# Altium PCB TTFT3.PcbDoc
Units mm, origin at the board's own origin, x right, y up, seen from the top; angles counter-clockwise.
Board outline 37.62 x 17.09 mm, 4 copper layers (Top Layer, Internal Plane 1, Internal Plane 2, Bottom Layer), stack 0.778 mm thick; 58 components, 51 nets, 261 pads, 50 vias.
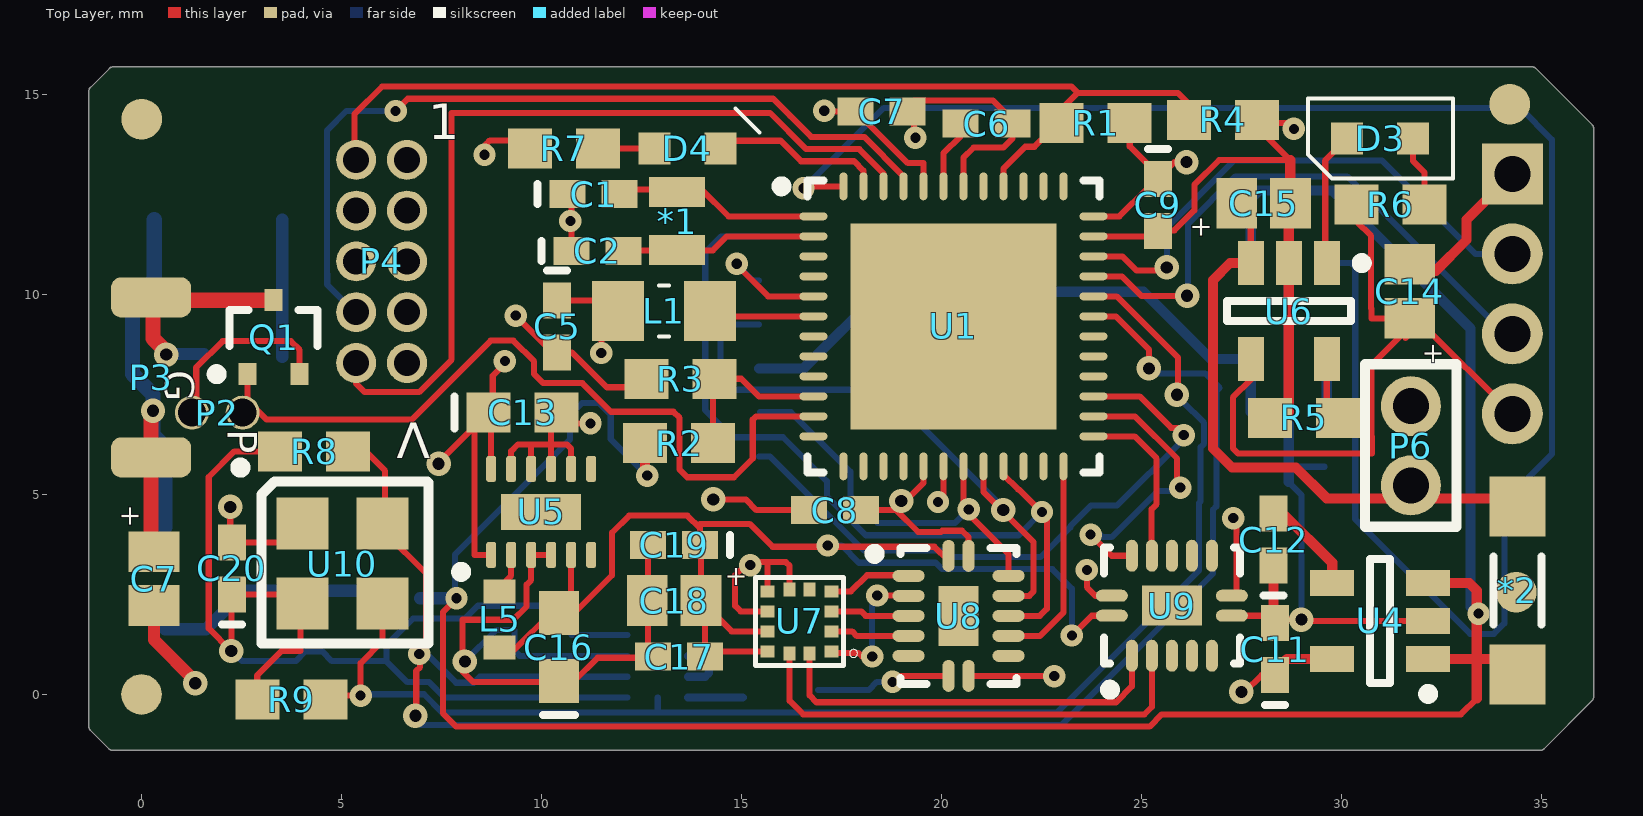
[diagram p0: Top Layer view]
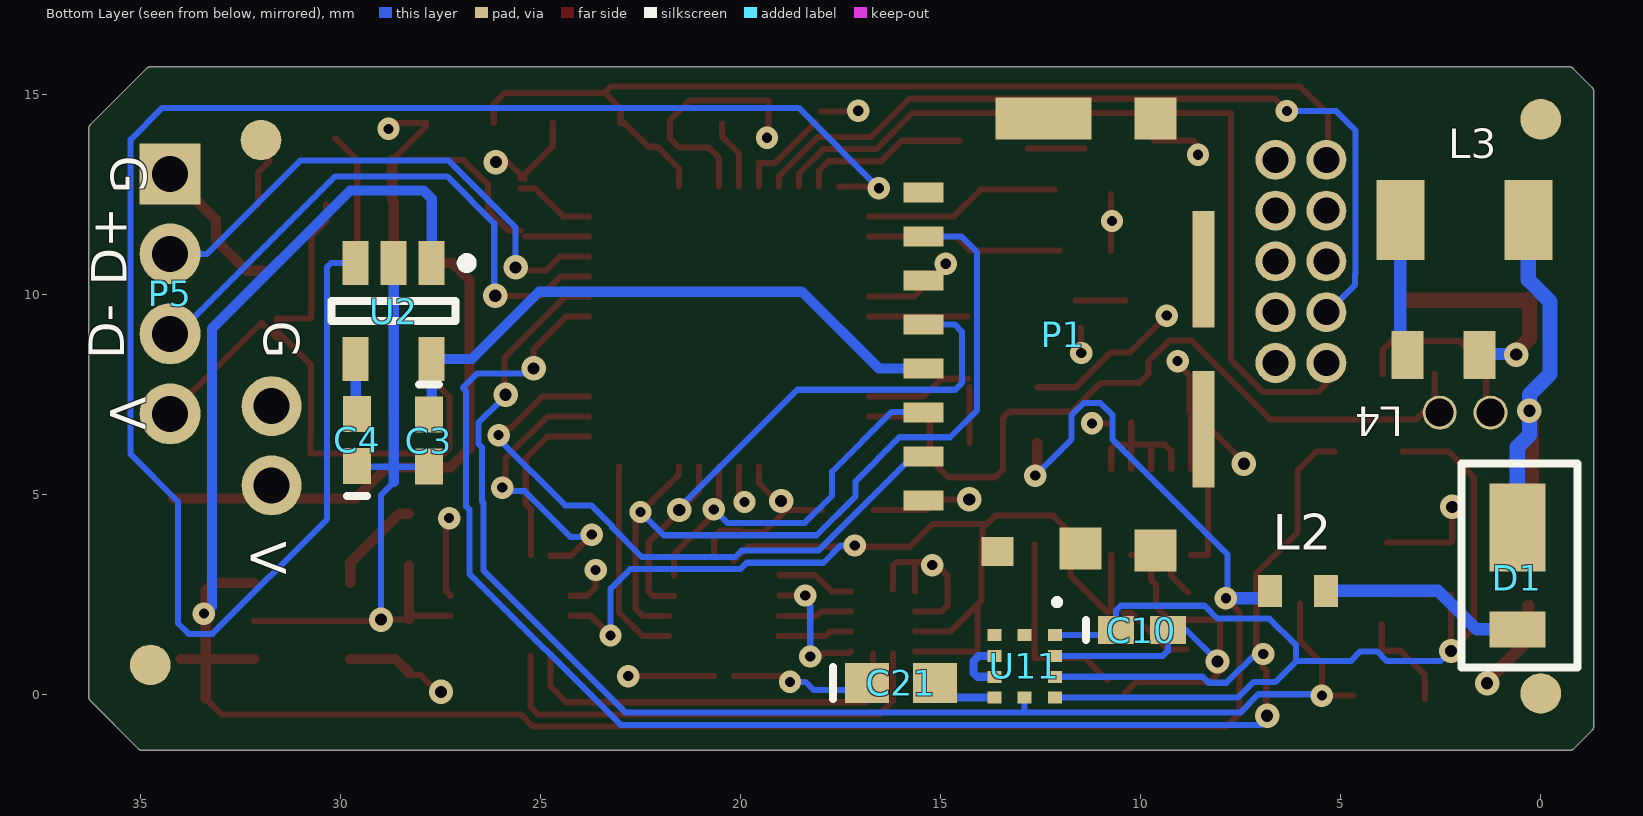
[diagram p1: Bottom Layer view, seen from below]
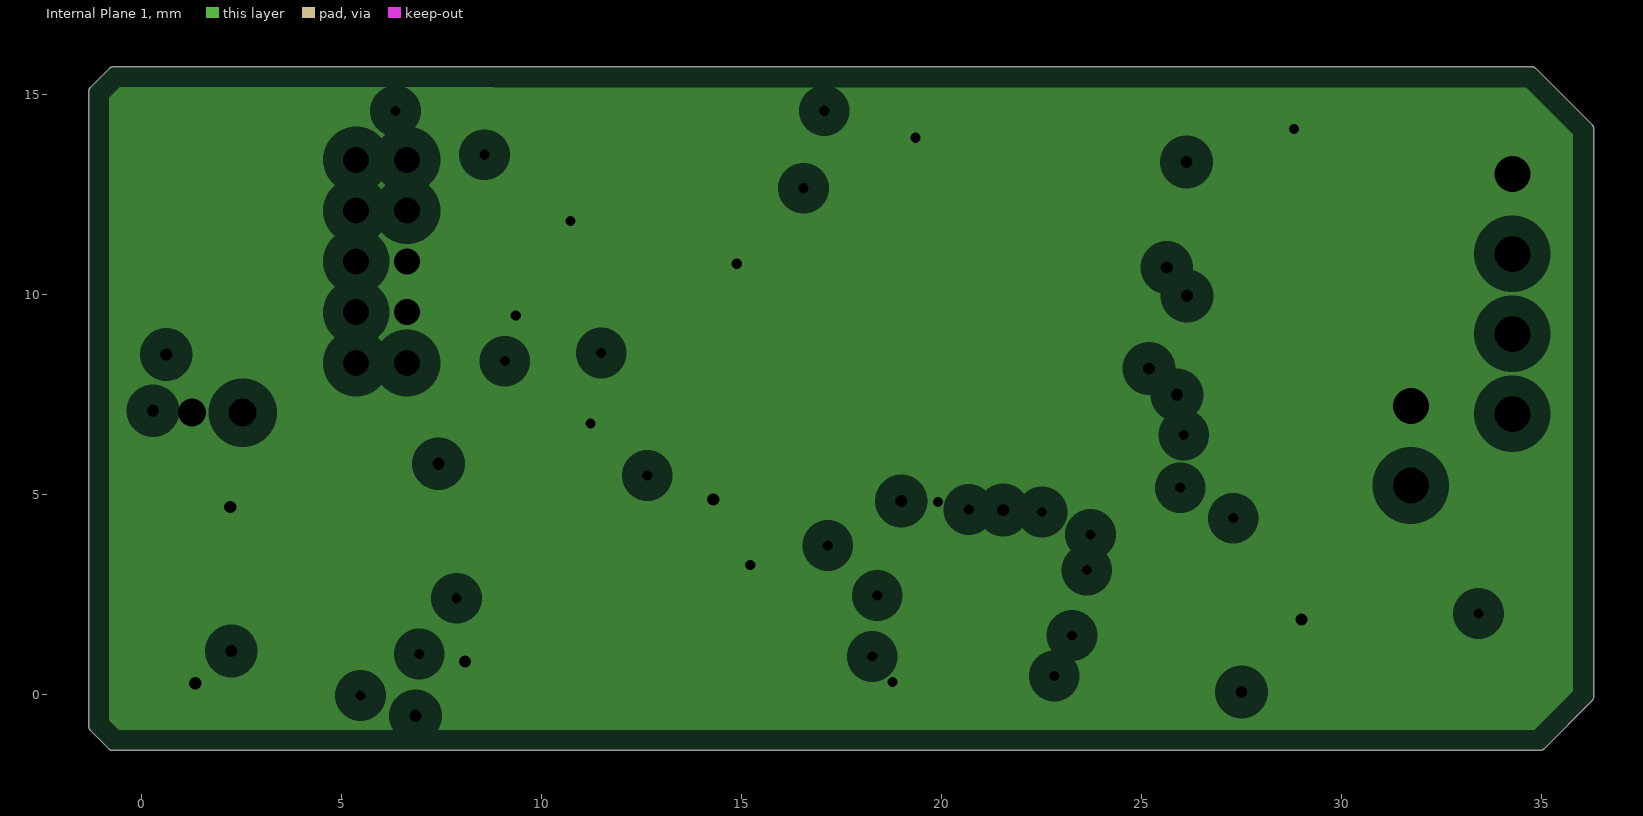
[diagram p2: Internal Plane 1, clearances drawn from the general rule]
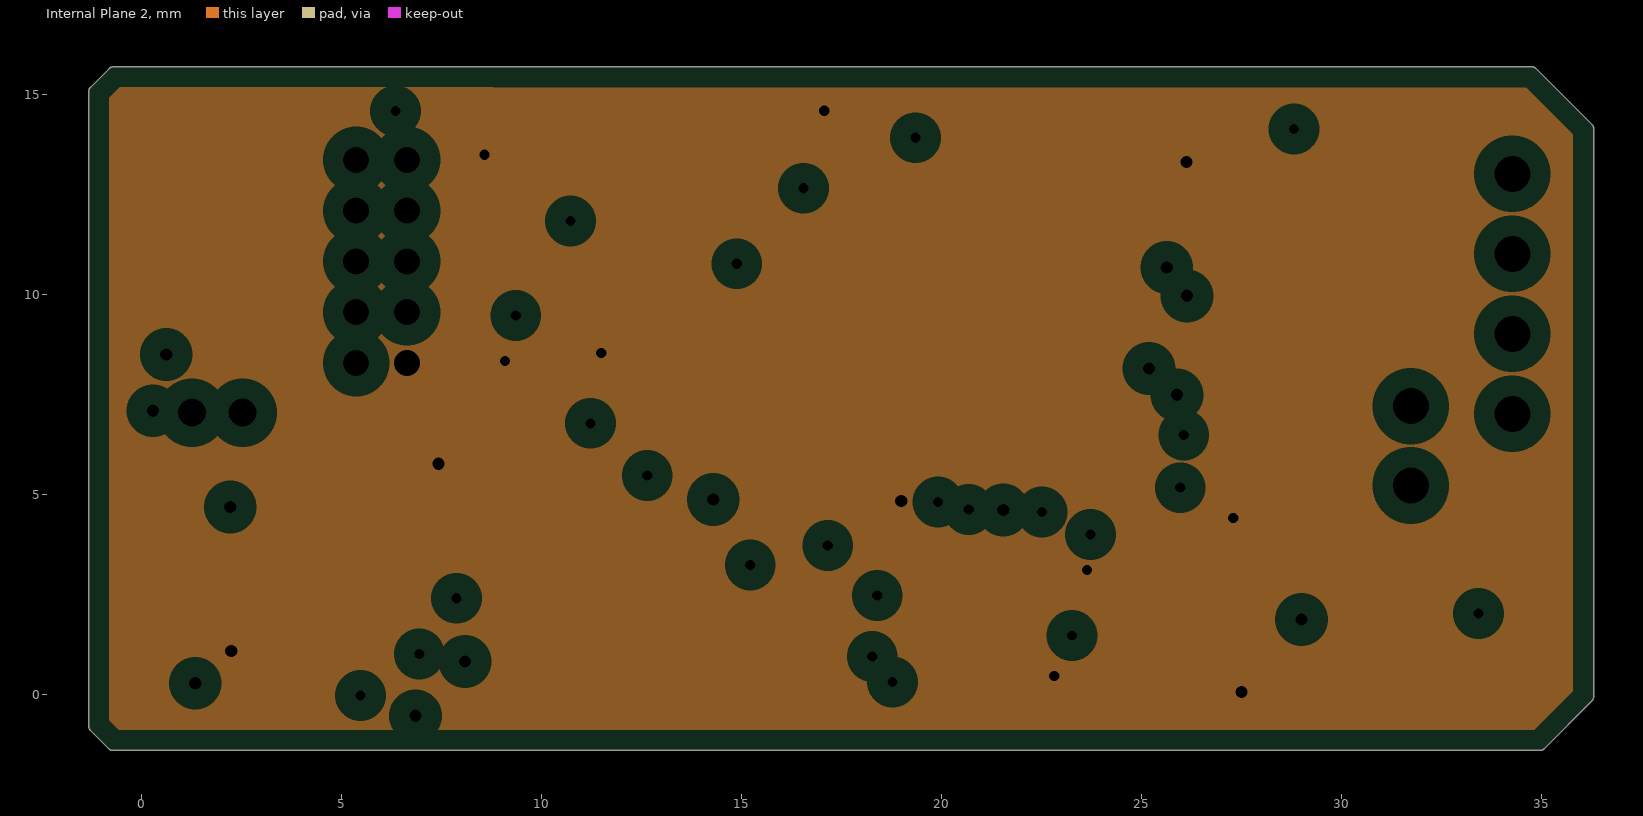
[diagram p3: Internal Plane 2, clearances drawn from the general rule]

## Layer stack, top to bottom
Top Solder: solder mask 0.0102, Solder Resist, Dk 3.5
Top Layer: signal copper 0.0356
Dielectric 1: core 0.254, FR-4, Dk 4.2
Internal Plane 1: plane copper 0.036, net GND
Dielectric 3: prepreg 0.127, Dk 4.2
Internal Plane 2: plane copper 0.036, net VCC
Dielectric 2: core 0.254, Dk 4.2
Bottom Layer: signal copper 0.0356
Bottom Solder: solder mask 0.0102, Solder Resist, Dk 3.5

## Board outline
-1.282,-0.9 -0.82,-1.362 ccw(c-0.73,-1.272) -0.73,-1.4 34.967,-1.4 ccw(c34.967,-1.272) 35.057,-1.362 36.26,-0.159 36.26,-0.16 ccw(c36.17,-0.069) 36.297,-0.069 36.297,14.155 ccw(c36.17,14.155) 36.26,14.245 34.856,15.649 ccw(c34.766,15.559) 34.766,15.686 8.878,15.686 ccw(c8.862,15.56) 8.862,15.687 -0.717,15.687 ccw(c-0.717,15.56) -0.808,15.65 -0.807,15.65 -1.282,15.175 ccw(c-1.192,15.085) -1.32,15.085 -1.32,-0.81 ccw(c-1.192,-0.81)

## Design rules (kind name [scope] priority, off if disabled: settings)
Clearance [All] p1: gap=0.152
PlaneClearance [All] p1: clearance=0.508
PlaneConnect [All] p1: planeconnectstyle=Relief reliefexpansion=0.508 reliefentries=4 reliefconductorwidth=0.254 reliefairgap=0.254
PolygonConnect [All] p1: connectstyle=Relief reliefconductorwidth=0.254 reliefentries=4 polygonreliefangle="90 Angle" airgapwidth=0.254
RoutingVias [All] p1: holewidth=0.711 width=1.27 viastyle="Through Hole" minholewidth=0.254 minwidth=0.559 maxholewidth=0.711 maxwidth=1.27
SolderMaskExpansion [All] p1: expansion=0.102
Width [All] p1: maxlimit=1.27 minlimit=0.152 preferedwidth=0.152
27 further rules are at their usual default settings.

## Components (designator, comment, footprint, x,y, rotation, side; value= is the part's Value field where it differs from the comment)
*1 "XTAL_ABS06" XTAL-ABS06 13.386,11.833 r90 top
*2 "Reed_MK24" "Reed MK24-B-3" 34.392,2.598 r270 top
C1 "22.5pF" 0402 11.298,12.506 r0 top
C2 "22.5pF" 0402 11.391,11.087 r0 top
C3 "1.0uF" 0402 27.799,6.341 r270 bottom
C4 "10nF" 0402 29.591,6.361 r90 bottom
C5 "0.1uF" 0402 10.389,9.202 r270 top
C6 "0.1uF" 0402 21.124,14.27 r0 top
C7 "47uF" Tant0805 0.305,2.897 r90 top
C7 "0.1uF" 0402 18.498,14.577 r0 top
C8 "0.1 uF" 0402 17.328,4.607 r180 top
C9 "0.1 uF" 0402 25.404,12.241 r270 top
C10 "1.0uF" 0402 9.972,1.609 r180 bottom
C11 "1.0uF" 0402 28.338,1.131 r90 top
C12 "10nF" 0402 28.296,3.868 r90 top
C13 "C0603" 0603 9.523,7.053 r0 top
C14 "1uF" Tant0805 31.7,10.077 r270 top
C15 "1uF" Tant0805 28.048,12.278 r180 top
C16 "C0603" 0603 10.427,1.184 r90 top
C17 "100nF" 0402 13.437,0.947 r180 top
C18 "10uF" Tant0805 13.31,2.344 r0 top
C19 "100nF" 0402 13.31,3.741 r180 top
C20 "0.1uF" 0402 2.255,3.148 r90 top
C21 "C0603" 0603 15.992,0.289 r180 bottom
D1 "Shottky" DFLS130 0.586,3.278 r270 bottom
D3 "LED_0603" Diode0603 30.963,13.901 r180 top
D4 "LED_0603" Diode0603 13.643,13.646 r0 top
L1 "300Ohm" "0805 (M2125) Ferrite" 13.056,9.583 r180 top
L2 "47uH" "Inductor KLZ1608AHR" 6.071,2.589 r180 bottom
L3 "100uH" Inductor_NLV32T 1.912,11.865 r0 bottom
L4 "27uH" "Inductor MLZ2012M220WT000" 2.433,8.486 r180 bottom
L5 "2.2uH" "Inductor KLZ1608AHR" 8.948,1.874 r90 top
P1 "microSD" "Molex microSD" 15.438,4.849 r270 bottom
P2 "1x2 1.27mm" "Header1x2 1.27mm" 2.527,7.044 r90 top
P3 "PIEZO" PIEZO 0.236,5.925 r0 top
P4 "Cortex Debug" Header_2x5_50mil 6.632,13.365 r180 top
P5 "HDR_4x1_2mm" Hdr_4x1_2mm 34.265,13.012 r0 bottom
P6 "HDR_2x1_2mm" HDR_2x1_2mm 31.728,5.207 r0 top
Q1 "PMF250XN,115" NXP-SOT323_N 3.3,8.93 r90 top
R1 "10K" 3-0603 23.851,14.282 r180 top
R2 "100k" 3-0603 13.437,6.281 r180 top
R3 "100k" 3-0603 13.47,7.89 r0 top
R4 "Do not place" 3-0603 27.027,14.365 r0 top
R5 "2k" 3-0603 29.058,6.916 r0 top
R6 "330X" 3-0603 31.217,12.25 r0 top
R7 "330X" 3-0603 10.557,13.646 r0 top
R8 "4.7k" 3-0603 4.309,6.077 r0 top
R9 "4.7k" 3-0603 3.74,-0.126 r180 top
U1 "ATSAMD21GA-MUT" QFN127P600-8N 20.295,9.202 r0 top
U2 "LP3985IM5-3.3" MF05A_N 28.677,9.583 r270 bottom
U4 "LP3985IM5-3.3" MF05A_N 30.963,1.836 r180 top
U5 "TPS62740" TPS6274x 8.738,3.487 r90 top
U6 "MCP73831T-2DCI/OT" SOT-23-OT5_N 28.677,9.583 r270 top
U7 "LIS2DS12" LGA-12 17.247,1.074 r180 top
U8 "Level Shifter" DHVQFN14 20.422,1.963 r0 top
U9 "Level Shifter" DHVQFN14 25.756,2.217 r90 top
U10 "MS5837" MS5837 4.017,4.27 r0 top
U11 "MMC33160MT" MMC33160MT 12.143,1.481 r270 bottom

## Footprints (in the part's own frame and the unit in brackets; to place one, negate y for a bottom-side part, rotate by r counter-clockwise, add the part's x,y. Pads: shape width x height; smd on the part's side, far side on the other; paste and mask are expansions set on the pad)
3-0603 [mm] "Chip Resistor; Body 1.6 x 0.9 mm (LxW typ)"
  rect 1.1x1 smd: 1(-0.85,0) 2(0.85,0)
0402 [mm] "Chip Capacitor; Body 1.0 x 0.5 mm (LxW typ)"
  rect 0.9x0.7 smd: 1(-0.65,0) 2(0.65,0)
  silkscreen extent -1.4,-0.25 -1.4,0.25
0603 [mm] "Chip Capacitor; Body 1.6 x 0.8 mm (LxW typ)"
  rect 1.1x1 smd: 1(-0.85,0) 2(0.85,0)
  silkscreen extent -1.7,-0.4 -1.7,0.4
"0805 (M2125) Ferrite" [mm] "Chip Resistor; Body 2.0 x 1.3 mm (LxW typ)"
  rect 1.3x1.5 smd: 1(-1.15,0) 2(1.15,0)
  silkscreen extent -0.13,-0.64 0.13,0.64, body extent -1.15,-0.72 1.15,0.73, height 0.81
DFLS130 [mm] "Diode"
  rect 0.9x1.4 smd: A(1.65,0)
  rect 2.2x1.4 smd: K(-0.9,0)
  silkscreen extent -2.5,-1.4 2.6,1.5
DHVQFN14 [mm] "QFN, 14-Leads, Body 2.50x3.00mm, Pitch 0.50mm, Thermal Pad 1.00x1.50mm, IPC Medium Density"
  oval 0.3x0.8 smd: 1(-0.25,1.5) 7(-0.25,-1.5) 8(0.25,-1.5) 14(0.25,1.5)
  oval 0.8x0.3 smd: 2(-1.25,1) 3(-1.25,0.5) 4(-1.25,0) 5(-1.25,-0.5) 6(-1.25,-1) 9(1.25,-1) 10(1.25,-0.5) 11(1.25,0) 12(1.25,0.5) 13(1.25,1)
  rect 1x1.5 smd: 15(0,0)
  silkscreen extent -2.22,-1.7 1.45,1.7, body extent -1.3,-1.55 1.3,1.55, height 1
Diode0603 [mm]
  rect 0.8x0.8 smd: A(-0.825,0) K(0.825,0)
  silkscreen extent -1.83,-1 1.8,1
HDR_2x1_2mm [mm]
  round 1.5 hole 0.9: 1(0,0.016) 2(0,2)
  silkscreen extent -1.14,-1.02 1.14,3.05
Hdr_4x1_2mm [mil]
  rect 60x60 hole 35.43: 1(0,0)
  round 60 hole 35.43: 2(0,78.74) 3(0,157.48) 4(0,236.22)
"Header1x2 1.27mm" [mm]
  round 0.85 hole 0.7: 1(0,0) 2(0,1.27)
Header_2x5_50mil [mm]
  round 1 hole 0.65: 1(0,0) 2(1.27,0) 3(0,1.27) 4(1.27,1.27) 5(0,2.54) 6(1.27,2.54) 7(0,3.81) 8(1.27,3.81) 9(0,5.08) 10(1.27,5.08)
"Inductor KLZ1608AHR" [mm]
  rect 0.6x0.8 smd: 1(-0.7,0) 2(0.7,0)
"Inductor MLZ2012M220WT000" [mm]
  rect 0.8x1.2 smd: 1(-0.9,0) 2(0.9,0)
Inductor_NLV32T [mm]
  rect 1.2x2 smd: 1(-1.6,0) 2(1.6,0)
LGA-12 [mm] "LIS2DS12"
  rect 0.35x0.3 smd: 1(0,0) 2(0,-0.5) 3(0,-1) 4(0,-1.5) 7(1.6,-1.5) 8(1.6,-1) 9(1.6,-0.5) 10(1.6,0)
  rect 0.3x0.35 smd: 5(0.55,-1.55) 6(1.05,-1.55) 11(1.05,0.05) 12(0.55,0.05)
  silkscreen extent -0.65,-1.85 1.9,0.35
MF05A_N [mm] "SOT23, 5-Leads, Body 2.9x1.6mm, Pitch 0.95mm, Lead Span 2.8mm, IPC Medium Density"
  rect 1.1x0.65 smd: 1(-1.2,0.95) 2(-1.2,0) 3(-1.2,-0.95) 4(1.2,-0.95) 5(1.2,0.95)
  silkscreen extent -1.32,-1.55 0.25,1.95, body extent -0.9,-1.55 0.9,1.55, height 1.19
MMC33160MT [mm] "Memsic magnetometer"
  rect 0.3x0.35 smd: 1(0,0) 2(0,-0.76) 3(0,-1.52) 4(0.52,-1.52) 5(1.04,-1.52) 6(1.56,-1.52) 7(1.56,-0.76) 8(1.56,0) 9(1.04,0) 10(0.52,0)
  silkscreen extent -0.85,0.03 -0.8,0.07
"Molex microSD" [mm] "wicked small microSD"
  rect 0.5x1 smd: 1(0,0) 2(-1.1,0) 3(-2.2,0) 4(-3.3,0) 5(-4.4,0) 6(-5.5,0) 7(-6.6,0) 8(-7.7,0)
  rect 1.05x2.4 smd: ""(-9.55,3)
  rect 1.05x1.05 smd: ""(-9.55,5.8) ""(1.2,3.925) ""(1.25,5.8)
  rect 2.91x0.55 smd: ""(-5.775,7) ""(-1.775,7)
  rect 0.72x0.8 smd: ""(1.275,1.85)
MS5837 [mm]
  rect 1.3x1.3 smd: 1(0,0) 2(0,-2) 3(2,-2) 4(2,0)
  silkscreen extent -1.67,-3 3.15,1.52
NXP-SOT323_N [mm] "SOT23, 3-Leads, Body 2.2x1.35mm, Pitch 0.65mm, IPC Medium Density"
  rect 0.55x0.45 smd: 1(-0.925,0.65) 2(-0.925,-0.65) 3(0.925,0)
  silkscreen extent -1.05,-1.1 0.67,1.55, body extent -0.67,-1.1 0.67,1.1, height 1.1
PIEZO [mm]
  rrect50% 2x1 smd: 1(0,0) 2(0,4)
QFN127P600-8N [mm]
  oval 0.7x0.2 smd: 1(-3.5,2.75) 2(-3.5,2.25) 3(-3.5,1.75) 4(-3.5,1.25) 5(-3.5,0.75) 6(-3.5,0.25) 7(-3.5,-0.25) 8(-3.5,-0.75) 9(-3.5,-1.25) 10(-3.5,-1.75) 11(-3.5,-2.25) 12(-3.5,-2.75) 25(3.5,-2.75) 26(3.5,-2.25) 27(3.5,-1.75) 28(3.5,-1.25) 29(3.5,-0.75) 30(3.5,-0.25) 31(3.5,0.25) 32(3.5,0.75) 33(3.5,1.25) 34(3.5,1.75) 35(3.5,2.25) 36(3.5,2.75)
  oval 0.2x0.7 smd: 13(-2.75,-3.5) 14(-2.25,-3.5) 15(-1.75,-3.5) 16(-1.25,-3.5) 17(-0.75,-3.5) 18(-0.25,-3.5) 19(0.25,-3.5) 20(0.75,-3.5) 21(1.25,-3.5) 22(1.75,-3.5) 23(2.25,-3.5) 24(2.75,-3.5) 37(2.75,3.5) 38(2.25,3.5) 39(1.75,3.5) 40(1.25,3.5) 41(0.75,3.5) 42(0.25,3.5) 43(-0.25,3.5) 44(-0.75,3.5) 45(-1.25,3.5) 46(-1.75,3.5) 47(-2.25,3.5) 48(-2.75,3.5)
  rect 5.15x5.15 smd paste-1.778: 49(0,0)
  silkscreen extent -4.42,-3.65 3.65,3.65, body extent -3.5,-3.5 3.5,3.5, height 0.85
"Reed MK24-B-3" [mm] "Meder Reed Switch Surface Mount"
  rect 1.5x1.4 smd: 1(-2.1,0) 2(2.1,0)
  silkscreen extent -0.85,-0.6 0.85,0.6, body extent -2.75,-1.1 2.75,1.1, height 1.8
SOT-23-OT5_N [mm] "SOT23, 5-Leads, Body 2.9x1.7mm, Pitch 0.95mm, Lead Span 2.8mm, IPC Medium Density"
  rect 1.1x0.65 smd: 1(-1.2,0.95) 2(-1.2,0) 3(-1.2,-0.95) 4(1.2,-0.95) 5(1.2,0.95)
  silkscreen extent -1.32,-1.55 0.25,1.95, body extent -0.9,-1.55 0.9,1.55, height 1.45
Tant0805 [mil]
  rect 40x50 smd: 1(-26.5,0) 2(26.5,0)
TPS6274x [mm] "QFN, 12-Leads, Body 2.00x3.00mm, Pitch 0.50mm, Thermal Pad 0.90x2.00mm, IPC Medium Density"
  rrect50% 0.65x0.25 smd: 1(0,0) 2(0,-0.5) 3(0,-1) 4(0,-1.5) 5(0,-2) 6(0,-2.5) 7(2.15,-2.5) 8(2.15,-2) 9(2.15,-1.5) 10(2.15,-1) 11(2.15,-0.5) 12(2.15,0)
  rect 0.9x2 smd paste-0.1: 13(1.075,-1.25)
  silkscreen extent -0.55,0.63 -0.3,0.87, body extent 0.03,-2.8 2.12,0.3, height 0.8
XTAL-ABS06 [mm]
  rect 0.75x1.4 smd: 1(-0.725,0) 2(0.725,0)

## Part data
C1 C2 C3 C4 C5 C6 C7 C8 C9 C10 C11 C12 C17 C19 C20: library part C0402, "Ceramic Chip Capacitor - Standard"
C7 C14 C15 C18: library part Tant0805
C13 C16 C21: "Ceramic Chip Capacitor - Standard"
D1: library part DFLS130
L1: library part "Ferrite 0805(M2125) 3A", "Ferrite 25mOhm@DC,  60 Ohm@100MHz"
L2 L5: library part "Inductor KLZ1608"
L3: library part Inductor_NLV32T
L4: library part "Inductor MLZ2012M220WT000"
P1: library part "microSD Molex tiny"
P2: library part "Header 1x2 1.27mm"
P4: library part CortexDebug
Q1: "N-Channel Trench MOSFET, 30 V, 0.9 A, -55 to 150 degC, 3-Pin SOT323, Tape and Reel"
R1 R2 R3 R4 R5 R6 R7 R8 R9: library part ERJ3RK, "Precision Thick Film Chip Resistor, 10 Ohm to 1M Ohm Range, 1% and 0.5% Tolerance, 0603 Size, 0.063 W"
U1: library part ATSAMD21G18
U2 U4: "Micropower, 150mA Low-Noise Ultra Low-Dropout CMOS Voltage Regulator, 5-pin SOT-23"
U5: library part TPS6274x
U6: "Miniature Single-Cell, Fully Integrated Li-Ion, Li-Polymer Charge Management Controller, 4.2V, 5-Pin SOT-23, Industrial Temperature, Tape and Reel"
U8 U9: library part NTB0104, "Voltage level translator"
U10: "Pressure/Temp"

## Free pads (board coordinates)
  round 1.016 smd paste-0.508 mask+0.127: 0(-0.003,-0.001) 0(0,14.381) 0(34.202,14.756) 0(34.361,2.557)
  round 1.016 smd far side paste-0.508 mask+0.127: 0(0,14.376) 0(0.002,0.024) 0(31.996,13.858) 0(34.76,0.737)

## Via types
v1: diameter 0.559, hole 0.254, Top Layer to Bottom Layer, 32 vias
v2: diameter 0.61, hole 0.305, Top Layer to Bottom Layer, tented bottom, 18 vias

## Nets (pads, with @x,y where several pads share a name; then routed paths per layer and width w, separated by ;. In a path a pad name is that pad's centre, name@x,y a point inside that pad or via, vN(x,y) a via of type N, cw(c..) or ccw(c..) an arc to the next point about the centre after c; other vN are vias at no path point)
A4: R2.1 R3.2 U1.10 | length 4.1
  Top Layer w0.152: R2.1 R3.2@14.287,7.678 ; R3.2 14.99,7.89 15.428,7.452 U1.10
CS: P1.2 U1.27 | length 15.7
  Top Layer w0.152: U1.27 24.949,7.452 25.739,6.662 v1@26.01,6.662
  Bottom Layer w0.152: P1.2 15.705,5.949 18.058,3.596 19.977,3.596 20.138,3.435 22.473,3.435 23.216,4.178 23.216,4.205 23.734,4.723 24.388,4.723 26.01,6.346 v1@26.01,6.662
  other v1: 26.054,6.481
CS_LIS: U1.24 U8.10 | length 5.2
  Top Layer w0.152: U8.10@21.791,1.455 22.454,1.455 23.045,2.046 U1.24
CS_LIS_1.8: U7.2 U8.5 | length 1.9
  Top Layer w0.152: U7.2 17.763,1.574 17.882,1.455 U8.5@19.053,1.455
D+: P5.2 U1.34 | length 13.3
  Top Layer w0.152: U1.34 24.514,10.952 24.867,10.599 v2@25.629,10.599
  Bottom Layer w0.152: v2(25.629,10.675) 25.629,11.668 27.31,13.35 31.006,13.35 33.344,11.012 P5.2
D-: P5.3 U1.33 | length 14.6
  Top Layer w0.152: U1.33 24.506,10.452 24.994,9.964 v2(26.137,9.964)
  Bottom Layer w0.152: v2(26.137,9.964) 26.162,9.989 26.162,11.771 27.341,12.949 30.137,12.949 34.074,9.012 P5.3
GND: C1.1 C2.1 C3.2 C4.1 C5.2 C6.2 C7.1@0.305,2.224 C7.2@19.148,14.577 C8.2 C9.2 C10.2 C11.2 C12.1 C13.2 C14.1 C15.1 C16.1 C17.2 C18.1 C19.2 C20.2 C21.1 P1.6 P2.2 P4.5 P4.7 P5.1 P6.2 Q1.2 R3.1 R4.2 R5.1 U1.5 U1.18 U1.35 U1.42 U2.2 U4.2 U5.3 U5.4 U5.8 U5.9 U5.10 U5.11 U6.2 U7.6 U7.7 U7.8 U8.7 U9.7 U10.1 U11.10 | length 92.6
  Top Layer w0.152: P2.2@1.364,7.052 1.364,8.173 2.024,8.834 3.73,8.834 3.95,8.613 Q1.2 ; C20.2@2.214,3.84 v2(2.214,4.688) ; C20.2 U10.1@3.843,3.798 ; U5.11 9.238,6.082 9.408,6.252 10.238,6.252 ; v1(9.351,9.47) 10.27,8.552 C5.2 10.753,8.552 11.637,7.668 ; U5.10 9.738,6.161 ; U5.4 U5.3 9.738,2.857 9.622,2.741 9.622,2.198 9.291,1.866 8.017,1.866 8.017,0.575 8.286,0.306 10.129,0.306 C16.1@10.392,0.042 ; U5.9 10.238,6.252 ; C13.2@10.238,6.804 10.238,6.252 ; U5.8 10.738,6.147 10.632,6.252 10.238,6.252 ; C2.1 C1.1@10.741,12.509 ; C13.2@10.744,6.776 v1(11.22,6.776) ; C16.1@10.833,0.35 11.399,0.916 12.66,0.916 C19.2 ; 11.646,7.678 R3.1@12.587,7.678 ; v2(14.288,4.875) 15.101,4.875 15.369,4.607 C8.2 ; v1(14.877,10.768) v1@14.877,10.896 ; v1@14.877,10.88 14.806,10.81 15.664,9.952 U1.5 ; U7.8 14.977,2.074 14.834,2.217 14.834,2.979 15.164,3.309 15.596,3.309 ; U7.7 15.647,3.258 15.596,3.309 ; U7.6 16.197,3.216 16.104,3.309 15.596,3.309 ; v1(18.771,0.312) 18.922,0.463 U8.7 ; v1@19.391,14.001 19.31,14.081 19.31,14.848 21.279,14.848 21.774,14.354 C6.2 21.774,13.901 21.543,13.671 20.795,13.671 20.545,13.42 U1.42 ; v1@20.045,4.888 U1.18 ; U1.35 C9.2@25.396,11.452 ; C9.2@25.502,11.6 25.816,11.6 26.32,12.104 26.32,12.741 26.934,13.355 28.715,13.355 27.876,14.194 27.876,14.282 v1@28.662,14.282 ; U9.7 C11.2@28.18,1.967 ; C11.2@28.426,1.869 v2(28.994,1.869) 29.026,1.836 U4.2
  Top Layer w0.254: C11.2@28.296,1.869 C12.1 ; R5.1@28.677,7.043 U6.2 C15.1@28.677,12.339 ; C15.1@28.715,12.377 28.715,13.355 ; C14.1@31.932,10.59 32.351,10.59 33.122,11.361 33.122,11.869 P5.1
  Top Layer w0.305: C7.1@0.305,2.224 0.305,1.365 v2@1.36,0.31
  Bottom Layer w0.152: v2(8.081,0.823) 8.867,1.609 C10.2 9.322,1.088 9.45,0.961 U11.10 ; v1(14.877,10.768) v1@14.877,10.896 ; v1@14.877,10.88 14.806,10.81 15.267,10.349 P1.6 ; C21.1@16.913,0.106 18.177,0.106 18.382,0.312 v1(18.771,0.312) ; C3.2 28.677,5.691 C4.1@29.572,5.691 ; 28.677,5.306 28.994,4.989 v2(28.994,1.869)
  Bottom Layer w0.254: 28.677,5.306 28.677,5.691 U2.2
  other v1: 15.215,3.233 19.907,4.809 10.718,11.836 19.343,13.916 28.806,14.138
  other v2: 1.341,0.28
HVDD: C7.2@0.305,3.57 D1.K L3.1 P3.1 | length 11.6
  Top Layer w0.381: C7.2@0.236,3.659 P3.1 v2@0.236,7.043
  Bottom Layer w0.381: L3.1 0.312,10.366 -0.229,9.825 -0.229,8.007 0.285,7.493 v2(0.285,7.091) 0.285,6.484 0.586,6.182 D1.K
INT1: U1.26 U9.13 | length 7.6
  Top Layer w0.152: v1(23.724,3.995) 24.252,3.467 U9.13 ; U1.26 24.831,6.952 25.883,5.9 25.883,5.392 v1@26.137,5.138
  Bottom Layer w0.152: v1(23.724,3.995) 23.961,3.995 24.023,3.933 24.248,3.933 25.399,5.084 26.083,5.084 v1@26.137,5.138
  other v1: 25.964,5.168
INT1_1.8: U7.12 U9.2 | length 10.1
  Top Layer w0.152: U7.12 16.697,-0.027 16.866,-0.196 24.359,-0.196 24.756,0.201 U9.2
INT2: U1.25 U9.12 | length 4.3
  Top Layer w0.152: U1.25 24.823,6.452 25.375,5.9 25.375,4.757 25.248,4.63 U9.12@25.248,3.487
INT2_1.8: U7.11 U9.3 | length 11.7
  Top Layer w0.152: U7.11 16.197,-0.162 16.536,-0.501 25.07,-0.501 25.256,-0.315 U9.3
LED1: D4.K U1.47 | length 4.2
  Top Layer w0.152: D4.K@14.536,13.84 15.974,13.84 16.485,13.328 17.812,13.328 18.045,13.096 U1.47
MISO: P1.7 U1.21 U8.11 | length 20.7
  Top Layer w0.152: U1.21 21.545,5.487 21.909,5.123 21.932,5.123 22.632,4.423 22.632,2.141 22.454,1.963 U8.11@21.799,1.963
  Bottom Layer w0.152: P1.7 14.485,11.449 14.09,11.054 14.09,7.107 14.77,6.428 16.033,6.428 17.129,5.332 17.129,4.957 18.107,3.979 21.925,3.979 v1(22.508,4.562) ; v1@22.563,4.507 v1@22.692,4.637
MISO_1.8: U7.3 U8.4 | length 1.8
  Top Layer w0.152: U7.3 17.991,2.074 18.102,1.963 U8.4@19.045,1.963
MOSI: P1.3 U1.19 U8.13 | length 10.1
  Top Layer w0.152: U1.19 20.549,5.698 20.549,4.63 21.672,3.507 U8.13
  Bottom Layer w0.152: P1.3@15.465,7.056 16.233,7.056 17.72,5.569 17.72,4.962 18.395,4.286 20.337,4.286 v1(20.676,4.626)
MOSI_1.8: U7.4 U8.2 | length 1.9
  Top Layer w0.152: U7.4 17.731,2.574 18.136,2.979 U8.2@19.029,2.979
Net*1_1: *1.1 C2.2 U1.2 | length 4.9
  Top Layer w0.152: C2.2@12.035,11.102 14.278,11.102 14.628,11.452 U1.2
Net*1_2: *1.2 C1.2 U1.1 | length 4.9
  Top Layer w0.152: C1.2@12.156,12.621 14.002,12.621 14.671,11.952 U1.1
NetC4_2: C4.2 U2.4 | length 1.3
  Bottom Layer w0.254: C4.2@29.627,7.047 U2.4
NetC6_1: C6.1 U1.43 | length 1.7
  Top Layer w0.152: U1.43 20.045,13.528 20.474,13.957 C6.1
NetC12_2: C12.2 U4.4 | length 2.5
  Top Layer w0.254: C12.2 28.535,4.518 29.763,3.29 U4.4
NetC21_2: C21.2 U11.6 | length 1.4
  Bottom Layer w0.203: U11.6 C21.2@15.028,-0.079
NetD1_A: D1.A L2.2 | length 5.2
  Bottom Layer w0.305: D1.A 1.61,1.628 2.572,2.589 L2.2
NetD3_A: D3.A R6.2 | length 1.8
  Top Layer w0.152: D3.A 31.788,13.33 32.067,13.051 R6.2
NetD3_K: D3.K U6.1 | length 3.4
  Top Layer w0.152: U6.1 29.588,10.821 29.588,13.351 D3.K
NetD4_A: D4.A R7.2 | length 1.4
  Top Layer w0.152: R7.2 D4.A
NetL1_1: L1.1 U1.6 | length 2.5
  Top Layer w0.152: L1.1@14.337,9.452 U1.6
NetL3_2: L3.2 L4.1 | length 3.4
  Bottom Layer w0.305: L4.1@3.512,8.433 L3.2
NetL5_2: L5.2 U5.2 | length 1.1
  Top Layer w0.152: L5.2@8.821,2.554 9.238,2.971 U5.2
NetR5_2: R5.2 U6.5 | length 1.4
  Top Layer w0.152: R5.2@29.627,6.943 U6.5
NetU11_4: U11.4 U11.5 | length 1.4
  Bottom Layer w0.203: U11.5 14.088,0.441 14.187,0.539 14.187,0.829 14.055,0.961 U11.4
O2POW: U1.13
PA20: U1.29
PA21: U1.30
PIEZO: L4.2 P3.2 Q1.3 | length 5.4
  Top Layer w0.152: P3.2 P3.2@0.284,9.877
  Top Layer w0.381: P3.2@0.284,9.877 0.284,8.894 v2@0.641,8.538 ; P3.2@0.306,9.855 Q1.3
  Bottom Layer w0.305: v2@0.739,8.51 L4.2@1.56,8.51
  other v2: 0.615,8.494
PWM: P2.1 Q1.1 U1.11 | length 19.4
  Top Layer w0.152: Q1.1 2.65,7.343 3.124,6.869 6.75,6.869 8.727,8.846 9.288,8.846 9.81,8.324 9.81,8.007 10.036,7.781 11.017,7.781 11.732,7.067 13.293,7.067 13.449,6.911 13.449,5.62 13.641,5.428 14.808,5.428 15.277,5.897 15.277,6.869 15.359,6.952 U1.11
RESET: P4.2 R1.2 R4.1 U1.40 | length 26.3
  Top Layer w0.152: P4.2 5.317,13.41 5.317,14.504 6.008,15.195 23.248,15.195 23.404,15.039 ; U1.40 21.545,13.147 22.089,13.691 22.318,13.691 22.909,14.282 R1.2 23.001,14.636 23.404,15.039 ; R4.1@26.176,14.282 26.176,14.766 25.904,15.039 23.404,15.039
SCK: P1.5 U1.20 U8.12 | length 15.1
  Top Layer w0.152: U1.20 21.045,5.061 22.301,3.805 22.301,2.575 22.188,2.463 U8.12
  Bottom Layer w0.152: P1.5 14.655,9.249 14.474,9.068 14.474,7.781 14.639,7.615 18.589,7.615 21.539,4.665 v2(21.539,4.611)
SCK_1.8: U7.1 U8.3 | length 3.2
  Top Layer w0.152: U7.1 17.29,1.031 17.925,1.031 18.009,0.947 v1(18.263,0.947) ; v1@18.39,2.344 18.517,2.471 U8.3@19.037,2.471
  Bottom Layer w0.152: v1(18.263,0.947) 18.263,2.217 v1@18.39,2.344
  other v1: 18.39,2.471
SCL: R9.1 U1.32 U10.3 U11.7 | length 34.5
  Top Layer w0.152: R9.1@4.684,-0.031 v1(5.473,-0.031) 5.473,0.782 6.017,1.326 U10.3 ; U1.32 24.373,9.952 25.91,8.416 v2@25.91,7.537
  Bottom Layer w0.152: v1@5.473,0.002 7.059,0.002 7.519,-0.458 12.903,-0.458 ; U11.7 12.903,-0.458 ; v2@26.018,7.331 26.562,6.788 26.562,6.271 26.474,6.183 26.474,4.829 26.434,4.789 26.434,3.1 22.876,-0.458 12.903,-0.458
  other v2: 25.88,7.489
SD_POW: U1.48 U2.3 | length 45.6
  Top Layer w0.152: v1(16.547,12.654) 16.595,12.702 U1.48 U1.48@17.52,12.677
  Bottom Layer w0.152: v1(16.547,12.654) 18.553,14.661 34.464,14.661 35.256,13.869 35.256,6.006 34.07,4.821 34.07,1.777 33.804,1.512 33.211,1.512 30.34,4.383 30.34,10.688 30.245,10.783 U2.3
SD_VCC: C3.1 P1.4 U2.5 | length 15.1
  Bottom Layer w0.254: P1.4 16.552,8.149 18.469,10.066 25.044,10.066 26.728,8.383 U2.5 C3.1@27.727,7.064
SDA: R8.2 U1.31 U10.4 U11.9 | length 43.6
  Top Layer w0.152: R8.2 5.597,6.077 6.086,5.588 U10.4@6.086,4.049 ; U10.4@6.09,4.045 7.113,3.022 7.113,1.211 6.962,1.06 6.962,0.683 6.865,0.586 v2@6.865,-0.461 ; U1.31 24.354,9.452 25.186,8.62 v2@25.186,8.151
  Bottom Layer w0.152: v2@6.897,-0.68 6.979,-0.762 23.002,-0.762 26.783,3.019 26.783,4.616 26.866,4.7 26.866,7.582 26.948,7.664 26.585,8.027 25.303,8.027 v2(25.179,8.151) ; v1(6.94,1.008) 7.143,1.008 7.86,0.29 8.302,0.29 8.453,0.441 U11.9
  other v2: 6.843,-0.536
SWCLK: P4.8 U1.45 | length 20.7
  Top Layer w0.152: v1@6.323,14.561 v1(6.349,14.586) 6.653,14.89 15.786,14.89 16.215,14.461 16.738,13.938 18.065,13.938 19.045,12.958 U1.45
  Bottom Layer w0.152: P4.8 5.328,9.555 4.64,10.243 4.64,10.511 4.634,10.517 4.634,14.1 5.12,14.586 v1(6.349,14.586)
SWDIO: P4.10 U1.46 | length 21.2
  Top Layer w0.152: P4.10 5.362,7.772 5.578,7.556 6.934,7.556 7.749,8.371 7.749,14.534 15.711,14.534 16.612,13.633 17.939,13.633 18.545,13.027 U1.46
V1.8: C16.2 C17.1 C18.2 C19.1 L5.1 U5.5 U7.9 U7.10 U8.1 U9.1 | length 30.6
  Top Layer w0.152: L5.1@8.858,1.118 9.317,1.118 10.233,2.034 C16.2 ; C16.2@10.738,2.083 U5.5 ; C16.2@10.833,2.05 11.759,2.975 11.759,4.044 12.184,4.47 13.642,4.47 13.96,4.152 ; C19.1@13.691,3.817 C19.1@13.818,3.69 ; C19.1 13.96,4.152 ; C19.1@13.983,3.813 C18.2 14.753,1.574 U7.9 ; C17.1 C18.2@14.087,2.192 ; C17.1@14.214,1.074 U7.10 ; U8.1@20.172,3.336 19.818,3.69 15.774,3.69 15.2,4.264 13.96,4.264 13.96,4.152 ; v1(23.256,1.471) 23.751,1.967 U9.1
  Bottom Layer w0.152: v1(17.151,3.723) 17.5,3.723 17.932,3.291 19.851,3.291 20.012,3.13 22.768,3.13 23.256,2.642 v1(23.256,1.471)
V_BATT: *2.1 C15.2 P6.1 U6.3 | length 14.5
  Top Layer w0.152: U6.3 C15.2@27.727,12.019
  Top Layer w0.254: U6.3 27.209,10.783 26.782,10.356 26.782,6.149 27.26,5.671 28.854,5.671 29.625,4.9 31.725,4.9 *2.1@34.19,4.9
VBUS: C14.2 P5.4 R6.1 U6.4 | length 17.3
  Top Layer w0.152: U6.4 27.727,7.871 27.28,7.424 27.28,6.154 27.407,6.027 30.761,6.027 30.761,6.45 30.746,6.464 30.746,8.241 31.598,9.093 31.598,9.394 30.747,9.394 30.747,9.641 30.734,9.653 30.734,11.462 30.367,11.83 R6.1 ; C14.2@31.598,8.91 31.983,9.294 P5.4
VCC: C5.1 C7.1@17.848,14.577 C8.1 C9.1 C10.1 C11.1 C13.1 C20.1 L1.2 P4.9 R1.1 R7.1 R8.1 R9.2 U1.17 U1.36 U1.44 U4.5 U5.1 U5.12 U8.8 U8.14 U9.8 U9.14 U10.2 U11.1 U11.8 | length 62.9
  Top Layer w0.152: C20.1@2.241,2.484 v2(2.241,1.084) 1.677,1.648 1.677,5.435 2.319,6.077 R8.1 ; C20.1 U10.2@3.637,2.498 ; R9.2 2.89,0.473 3.507,1.09 3.975,1.09 U10.2@3.975,1.757 ; v2(7.422,5.765) 7.422,5.803 C13.1 ; C13.1@8.321,6.587 8.321,3.487 U5.1 ; v1(8.57,13.493) 8.424,13.493 8.614,13.683 8.614,13.757 8.706,13.849 R7.1@9.664,13.849 ; U5.12 C13.1@8.738,7.004 ; C13.1@8.777,7.053 8.777,7.965 v1@9.121,8.31 ; C5.1 L1.2@11.637,9.852 ; v1(11.489,8.534) 11.489,8.353 11.678,8.543 11.492,8.543 L1.2@11.492,9.169 ; v1@17.08,14.575 C7.1@17.997,14.575 ; C8.1 v2@18.868,4.607 ; C7.1@18.127,14.307 19.153,13.28 19.545,13.28 U1.44 ; U1.17 19.545,5.284 v2@18.868,4.607 ; U8.8 22.732,0.463 22.724,0.455 v1@22.821,0.455 ; U8.14 20.672,3.927 20.508,4.091 20.015,4.091 19.983,4.059 19.415,4.059 v2@18.868,4.607 ; v1(23.629,3.109) 23.629,2.682 23.845,2.467 U9.14 ; U1.36 24.442,11.952 25.136,12.646 C9.1@25.502,12.646 ; R1.1 24.701,13.701 C9.1@25.502,12.9 ; C9.1 25.819,13.306 v2(26.121,13.306) ; U9.8 27.366,2.577 v1@27.366,4.521 ; v2(27.494,0.062) 27.578,0.062 27.998,0.481 C11.1
  Top Layer w0.254: C11.1@28.296,0.551 28.631,0.886 U4.5
  Bottom Layer w0.152: v2(2.241,1.084) v2@2.251,1.084 ; v2@2.251,1.094 2.513,0.832 3.852,0.832 4.093,1.073 4.514,1.073 4.755,0.832 6.119,0.832 ; v1@9.029,8.382 v1(9.079,8.331) ; C10.1 10.622,2.093 10.499,2.216 8.404,2.216 8.082,1.894 6.784,1.894 6.119,1.229 6.119,0.832 ; C10.1@10.75,1.481 U11.1 ; U11.8 7.571,-0.079 7.185,0.307 6.643,0.307 6.119,0.832
  other v1: 22.815,0.458 27.291,4.406 17.064,14.59
  other v2: 18.991,4.836
VIN: *2.2 L2.1 R2.2 U2.1 U4.1 U4.3 | length 61.5
  Top Layer w0.152: v1(7.872,2.402) 7.529,2.059 7.529,-0.471 7.863,-0.806 25.196,-0.806 25.501,-0.501 32.982,-0.501 33.376,-0.107
  Top Layer w0.254: v1@12.587,5.52 R2.2 ; U4.1 33.376,0.886 ; U4.3 33.188,2.786 33.376,2.598 33.376,0.886 ; 33.376,-0.107 33.376,0.886 ; *2.2@34.004,0.886 33.376,0.886
  Bottom Layer w0.152: v1@7.835,2.439 7.835,3.5 10.712,6.376 10.712,6.987 11.009,7.284 11.43,7.284 11.728,6.987 11.728,6.38 v1(12.639,5.469)
  Bottom Layer w0.254: U2.1 27.727,12.394 27.927,12.594 29.77,12.594 33.224,9.14 33.224,2.186 v1@33.384,2.026
  Bottom Layer w0.305: L2.1@6.958,2.402 v1(7.872,2.402)
  other v1: 33.421,2.02
pads on no net: P1. P1.1 P1.8 P4.1 P4.3 P4.4 P4.6 U1.3 U1.4 U1.7 U1.8 U1.9 U1.12 U1.14 U1.15 U1.16 U1.22 U1.23 U1.28 U1.37 U1.38 U1.39 U1.41 U1.49 U5.6 U5.7 U5.13 U7.5 U8.6 U8.9 U8.15 U9.4 U9.5 U9.6 U9.9 U9.10 U9.11 U9.15 U11.2 U11.3

## Polygon pours and split planes (outlines as drawn)
GND on Internal Plane 1 (split plane): 8.878,15.176 34.607,15.176 35.787,13.996 35.787,0.09 34.808,-0.889 -0.571,-0.889 -0.809,-0.651 -0.809,14.926 -0.558,15.177 8.812,15.177 8.811,15.167 8.862,15.145 8.862,15.177 8.865,15.177
VCC on Internal Plane 2 (split plane): 8.878,15.176 34.607,15.176 35.787,13.996 35.787,0.09 34.808,-0.889 -0.571,-0.889 -0.809,-0.651 -0.809,14.926 -0.558,15.177 8.812,15.177 8.811,15.167 8.862,15.145 8.862,15.177 8.865,15.177

## Silkscreen, mask and mechanical layers (free items; w line width, h text height)
Top Overlay:
  text "1" at 7.17,13.582 h1.52
  text "G" at 0.324,8.098 h1.27 r270
  text "V" at 7.212,7.095 h1.52 r180
  text "P" at 1.905,6.63 h1.27 r270
Bottom Overlay:
  text "G" at 36.05,13.465 h1.52 r90
  text "D+" at 35.05,10.217 h1.52 r270
  text "G" at 32.231,9.337 h1.52 r90
  text "D-" at 35.119,8.373 h1.52 r270
  text "V" at 36.067,7.443 h1.52 r90
  text "V" at 32.547,3.831 h1.52 r90
Mechanical 1:
  lines w0.254: 8.491,15.559 34.766,15.559 36.17,14.155 36.17,-0.069 34.967,-1.272 -0.73,-1.272 -1.192,-0.81 -1.192,15.085 -0.717,15.56 8.862,15.56

## Text inside footprints (layer, text, board x,y; h text height)
C7: Top Overlay "+" at -0.076,4.167 h0.5 r90
C14: Top Overlay "+" at 32.081,8.807 h0.5 r270
C15: Top Overlay "+" at 26.778,11.897 h0.5 r180
C18: Top Overlay "+" at 14.58,2.725 h0.5